# Altium PCB ALL - Copy.PcbDoc (part 1 of 2)
Units mm, origin at the board's own origin, x right, y up, seen from the top; angles counter-clockwise.
Board outline 128.4 x 123.32 mm, 2 copper layers (Top Layer, Bottom Layer); 140 components, 118 nets, 647 pads, 124 vias.
Unrouted connection lines stored in the file: 23.
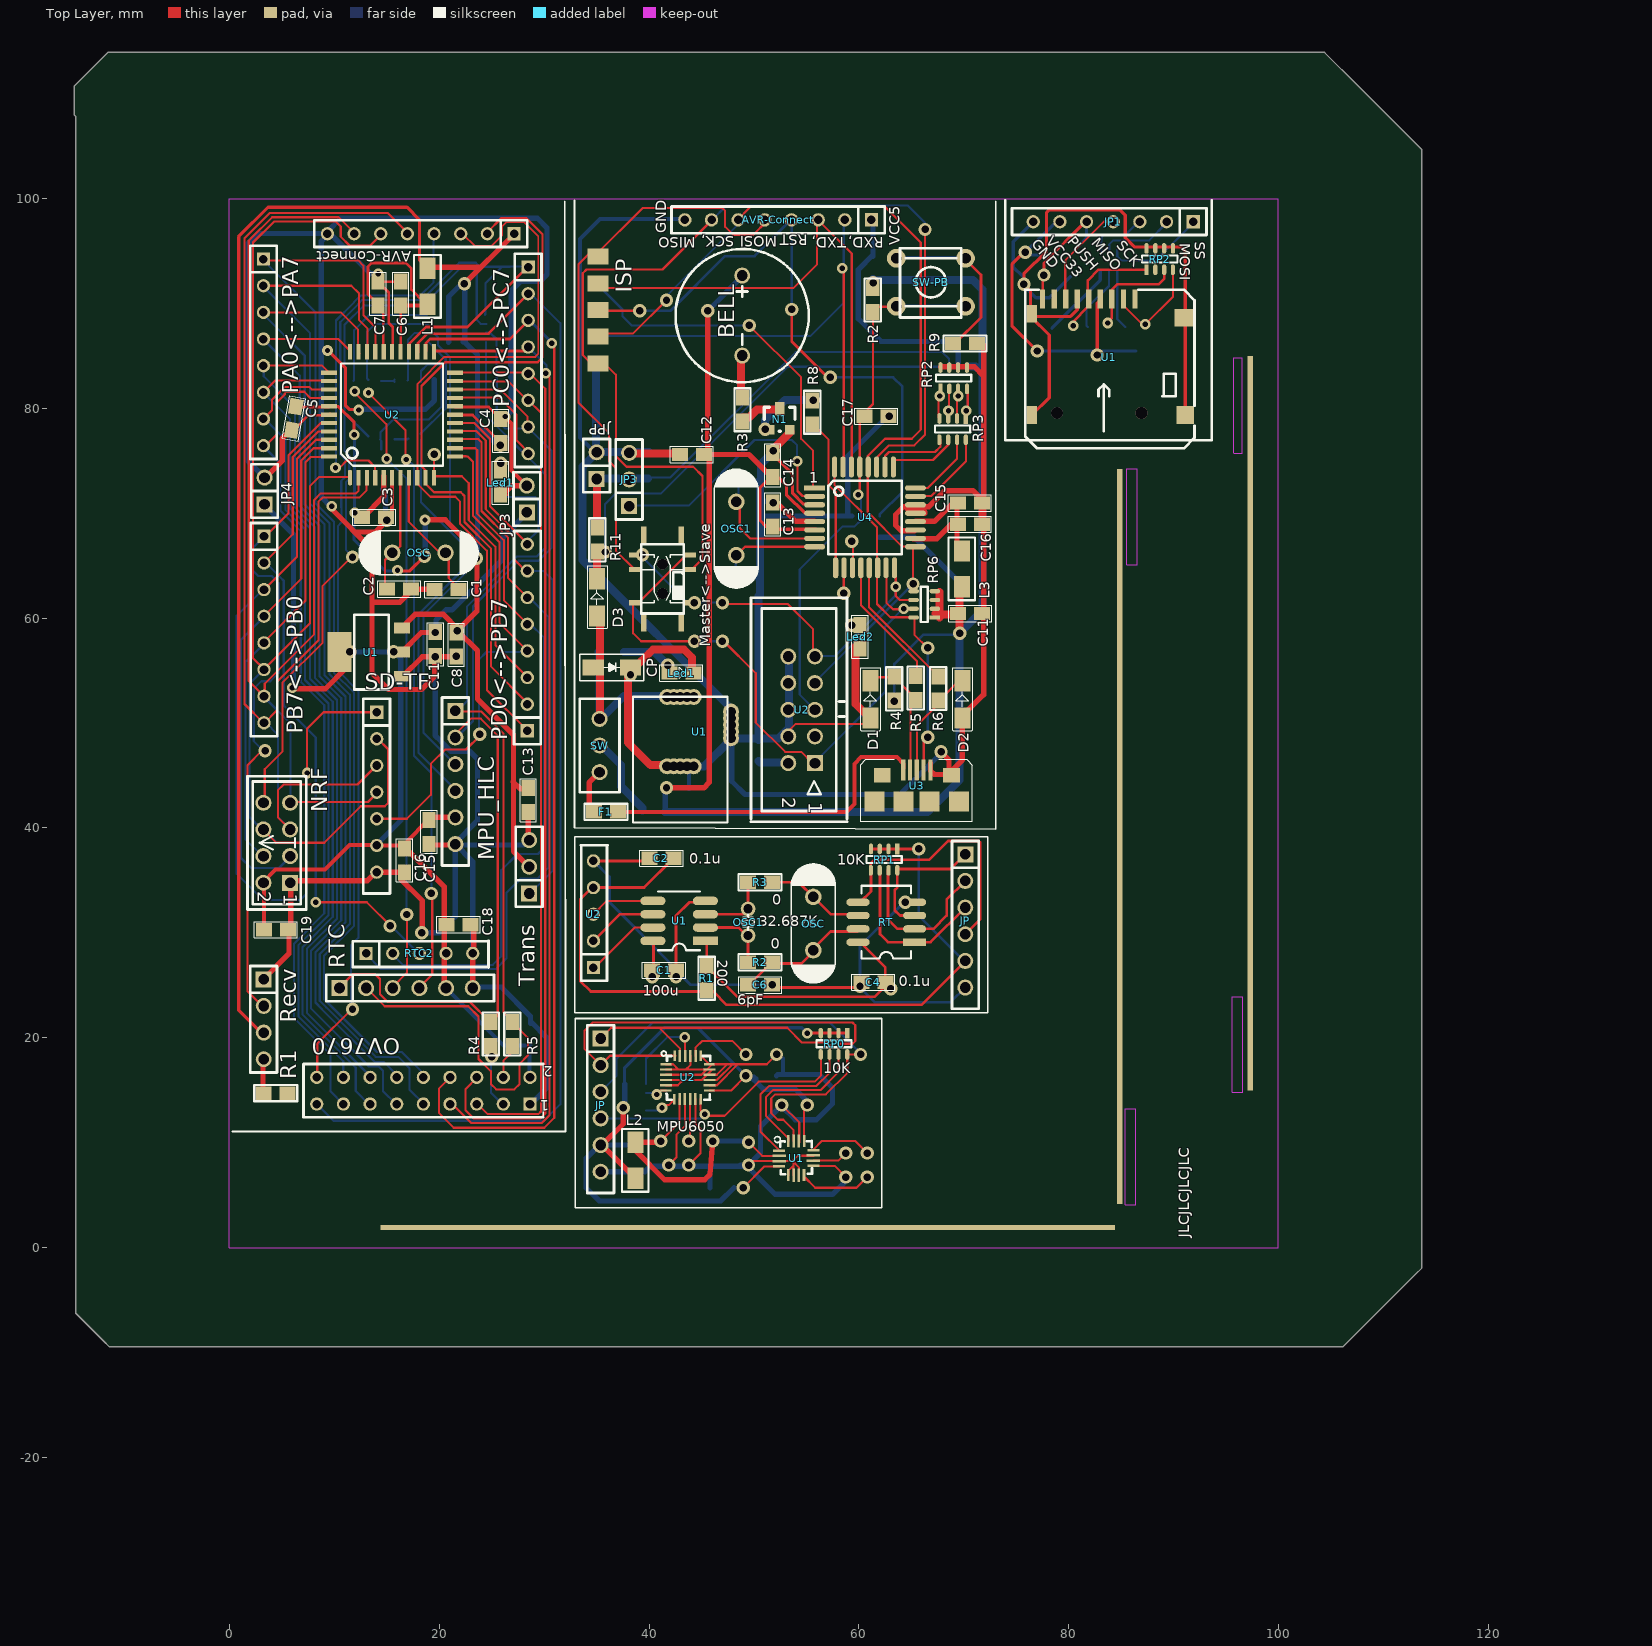
[diagram p0: Top Layer view]
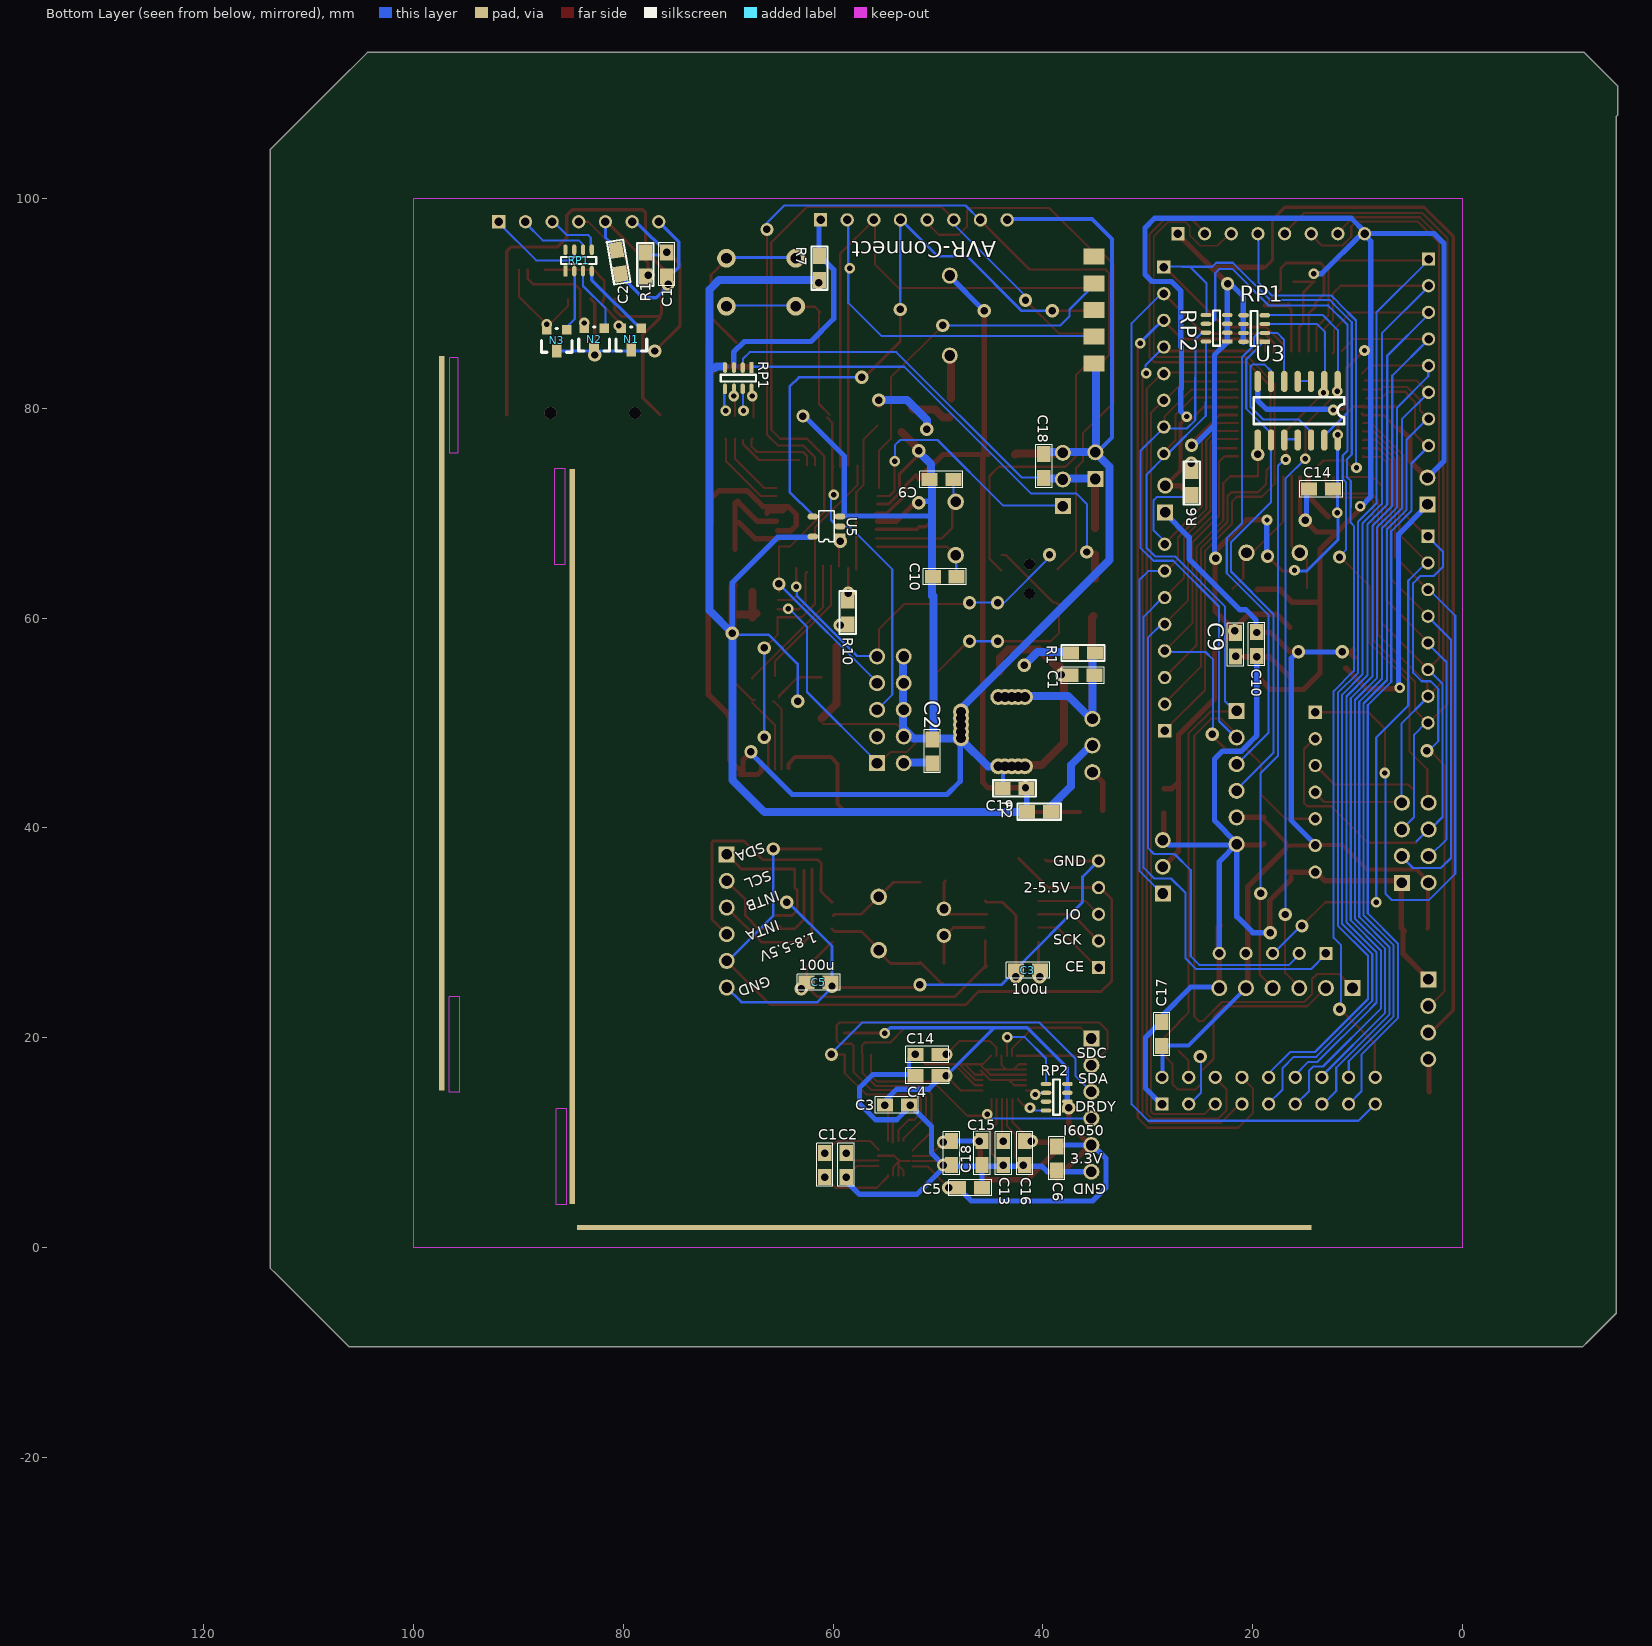
[diagram p1: Bottom Layer view, seen from below]

## Layer stack, top to bottom
Top Layer: signal copper 0.0356
Dielectric: dielectric 0.32, FR-4, Dk 4.8
Bottom Layer: signal copper 0.0356

## Board outline
-14.63,107.798 -14.63,-6.248 -11.963,-8.915 -11.455,-9.423 103.734,-9.423 106.147,-9.423 113.005,-2.565 113.64,-1.93 113.64,103.226 113.64,104.623 107.544,110.719 104.369,113.894 -10.82,113.894 -11.582,113.894 -14.63,110.846 -14.757,110.719 -14.757,107.925

## Design rules (kind name [scope] priority, off if disabled: settings)
Clearance [All] p1: gap=0.254
ComponentClearance [All] p1: gap=0.254 collisioncheckmode=3 verticalgap=0.254
PolygonConnect [All] p1: connectstyle=Relief reliefconductorwidth=0.254 reliefentries=4 polygonreliefangle="90 Angle"
RoutingVias [All] p1: holewidth=0.711 width=1.27 viastyle="Through Hole" minholewidth=0.711 minwidth=1.27 maxholewidth=0.711 maxwidth=1.27
SolderMaskExpansion [All] p1: expansion=0.102
TestPointUsage [All] p1: valid=0 allowmultiple=FALSE
Testpoint [All] p1: side=15 testpointundercomponent=TRUE minsize=1.016 maxsize=2.54 preferedsize=1.524 minholesize=0 maxholesize=1.016 preferedholesize=0.813 testpointgrid=0.025 style=1023 order=0-112345678
Width [All] p1: maxlimit=0.254 minlimit=0.254 preferedwidth=0.254
18 further rules are at their usual default settings.

## Components (designator, comment, footprint, x,y, rotation, side; value= is the part's Value field where it differs from the comment)
AVR-Connect "8PIN" SIP8 61.189,97.942 r180 top
AVR-Connect "8PIN" SIP8 27.127,96.622 r180 top
BELL "BELL" Bell 48.87,92.634 r270 top
C1 "100u" RC100 42.316,26.187 r180 top
C1 "CAPA" RC100 19.787,62.967 r0 top
C1 "CAPA" RC100 75.59,94.59 r270 bottom
C1 "0.22u" RC100 61.036,6.985 r90 bottom
C1 "0.1u" RC100 37.109,54.788 r180 bottom
C2 "0.1u" RC100 40.284,37.363 r0 top
C2 "CAPA" RC100 17.069,62.509 r180 top
C2 "CAPA" 0805 80.289,93.828 r80 bottom
C2 "4.7u" RC100 59.004,6.985 r90 bottom
C2 "0.1u" RC100 50.8,46.406 r90 bottom
C3 "CAPA" RC100 12.903,69.85 r0 top
C3 "0.1u" RC100 53.035,13.335 r0 bottom
C3 "100u" RC100 42.316,26.695 r180 bottom
C4 "0.1u" RC100 60.477,25.552 r0 top
C4 "CAPA" RC100 25.603,76.937 r90 top
C4 "0.1u" RC100 51.892,16.637 r180 bottom
C5 "CAPA" RC100 6.553,79.858 r260 top
C5 "0.1u" RC100 47.828,5.969 r180 bottom
C5 "100u" RC100 62.255,25.552 r180 bottom
C6 "6pF" RC100 49.682,25.298 r0 top
C6 "CAPA" RC100 16.078,90.018 r90 top
C6 "10u" RC100 38.43,9.398 r270 bottom
C7 "CAPA" RC100 13.919,90.018 r90 top
C8 "CAPA" RC100 21.869,58.369 r270 top
C9 "22pf" RC100 50.571,73.457 r180 bottom
C9 "CAPA" RC100 21.387,58.344 r270 bottom
C10 "22pf" RC100 50.241,64.186 r180 bottom
C10 "CAPA" RC100 19.38,58.395 r270 bottom
C11 "10u" RC100 69.698,60.681 r0 top
C11 "CAPA" RC100 19.888,58.395 r270 top
C12 "0.1u" RC100 44.958,75.336 r180 top
C13 "0.1u" RC100 51.537,68.986 r90 top
C13 "CAPA" RC100 28.727,43.536 r270 top
C13 "0.1u" RC100 43.51,9.906 r270 bottom
C14 "10u" RC100 51.537,73.685 r90 top
C14 "2.2n" RC100 50.114,18.161 r0 bottom
C14 "CAPA" RC100 12.598,72.034 r0 bottom
C15 "0.1u" RC100 69.672,71.222 r0 top
C15 "CAPA" RC100 19.279,40.513 r270 top
C15 "10n" RC100 46.05,8.128 r90 bottom
C16 "0.1u" RC100 69.672,69.19 r0 top
C16 "CAPA" RC100 16.942,37.795 r270 top
C16 "0.1u" RC100 41.478,9.906 r270 bottom
C17 "CAPA" RC100 62.56,78.969 r180 top
C17 "CAPA" RC100 28.931,19.456 r90 bottom
C18 "CAPA" RC100 22.733,30.531 r180 top
C18 "10u" RC100 48.463,9.906 r270 bottom
C18 "0.1u" RC100 40.157,73.584 r90 bottom
C19 "CAPA" RC100 5.334,30.048 r180 top
C19 "10u" 0805 42.824,43.637 r180 bottom
CP "100u" CP+140 34.671,55.296 r0 top
D1 "3.6V" DC140 63.348,54.026 r270 top
D2 "3.6V" DC140 72.111,54.026 r270 top
D3 "4148" DC140 37.313,63.754 r270 top
F1 "350mA" 0805 36.017,41.656 r180 top
F2 "FUSE" 0805 40.234,41.681 r0 bottom
ISP "SPI" DOWNLOAD-RC 32.639,97.053 r90 top
JP "6PIN" SIP6 35.382,19.939 r270 top
JP "6PIN" SIP6 70.129,37.49 r270 top
JP1 "7PIN" SIP7 91.846,97.765 r180 top
JP3 "3PIN" SIP3 38.1,70.663 r90 top
JP3 "2PIN" SIP2 28.346,70.079 r90 top
JP4 "2PIN" SIP2 3.353,70.841 r90 top
JPP "2PIN" SIP2 35.001,73.254 r90 top
L1 "LH" 1206 18.872,93.32 r270 top
L2 "LH" 1206 38.684,10.033 r270 top
L3 "LH" 1206 69.799,62.967 r90 top
Led1 "LED" LED 43.205,56.921 r0 top
Led1 "LED" LED 27.991,72.771 r270 top
Led2 "LED" LED 62.255,58.09 r270 top
Master<-->Slave "SW-DPDT" SW-DPDT 38.608,64.618 r270 top
MPU_HLC "6PIN" SIP6 21.539,51.156 r270 top
N1 "NPN-A" SOT-23A 51.486,77.927 r0 top
N1 "NPN-A" SOT-23A 78.257,87.605 r0 bottom
N2 "NPN-A" SOT-23A 81.813,87.605 r0 bottom
N3 "NPN-A" SOT-23A 85.369,87.478 r0 bottom
NRF "NRF2401" NRF2401 5.791,34.773 r270 top
OSC "32.687K" OSC200 55.651,33.426 r90 top
OSC "CRYSTAL" OSC200 15.519,66.218 r180 top
OSC1 "32.687H" OSC100 49.428,32.283 r270 top
OSC1 "12MHz" OSC200 48.311,65.989 r270 top
OV7670 "OV7670-K" SIP9X2 28.651,13.691 r180 top
PA0<-->PA7 "8PIN" SIP8 3.251,94.209 r270 top
PB7<-->PB0 "8PIN" SIP8 3.302,67.793 r270 top
PC0<-->PC7 "8PIN" SIP8 28.473,93.447 r270 top
PD0<-->PD7 "8PIN" SIP8 28.397,49.251 r90 top
R1 "200" 0805 45.618,25.552 r90 top
R1 "RES2A" 0805 4.547,14.859 r180 top
R1 "RES2A" 0805 77.749,93.574 r90 bottom
R1 "2K" 0805 36.297,56.54 r180 bottom
R2 "0" 0805 50.698,27.33 r180 top
R2 "10K" 0805 61.189,90.424 r270 top
R3 "0" 0805 50.698,34.95 r180 top
R3 "RES2A" 0805 49.022,79.731 r90 top
R4 "2.2K" 0805 63.475,53.137 r90 top
R4 "RES2A" 0805 25.044,20.244 r90 top
R5 "68" 0805 65.278,53.442 r270 top
R5 "RES2A" 0805 26.848,20.472 r270 top
R6 "68" 0805 67.412,53.391 r270 top
R6 "RES2A" 0805 25.933,73 r270 bottom
R7 "1" 0805 61.163,93.218 r90 bottom
R8 "RES2A" 0805 55.423,79.731 r270 top
R9 "RES2A" 0805 69.977,86.03 r0 top
R10 "RES2A" 0805 58.725,60.655 r270 bottom
R11 "1" 0805 35.204,67.335 r90 top
Recv "4PIN" SIP4 3.277,25.578 r270 top
RP0 "10K" RN4 58.877,20.447 r270 top
RP1 "10K" RN4 63.652,37.998 r270 top
RP1 "RESPACK4" RN4 85.496,93.066 r90 bottom
RP1 "RESPACK4" RN4 67.767,83.871 r270 bottom
RP1 "RESPACK4" RN4 18.847,86.335 r0 bottom
RP2 "RESPACK4" RN4 87.401,93.193 r90 top
RP2 "RESPACK4" RN4 67.767,81.839 r90 top
RP2 "2K" RN4 37.668,13.081 r0 bottom
RP2 "RESPACK4" RN4 22.428,86.36 r0 bottom
RP3 "RESPACK4" RN4 70.18,79.019 r270 top
RP6 "10K" RN4 67.234,60.046 r180 top
RT "SD2098" SOP-8_212 65.303,29.108 r180 top
RTC "6PIN" SIP6 10.49,24.74 r0 top
RTC2 "5PIN" SIP5 13.03,28.042 r0 top
SD-TF "7PIN" SIP7 14.046,51.029 r270 top
SW "SW-SPDT" SW-SPDT 35.281,47.854 r90 top
SW-PB "SW-PB" SW-PB 63.551,89.713 r90 top
Trans "3PIN" SIP3 28.575,33.757 r90 top
U1 "SD-MICRO" TF-2 86.639,83.033 r0 top
U1 "HMC5883L" LPCC-16 52.527,10.033 r0 top
U1 "DS1302" SO-8-197 45.364,29.235 r180 top
U1 "POWER" POWER-L 42.977,52.476 r180 top
U1 "VOTAGE_V33" SOT-223 16.459,54.458 r90 top
U2 "MPU6050" QFN-24 41.732,18.161 r0 top
U2 "5PIN" SIP5 34.696,26.695 r90 top
U2 "DOWNLOAD_SPI" DOWNLOAD 55.804,46.177 r270 top
U2 "AT90S8535_TQFP44" TQFP-44 11.506,73.381 r90 top
U3 "USB-MICRO" USB-MICRO-R 64.211,45.517 r0 top
U3 "74HC08" SO-14 11.913,82.55 r270 bottom
U4 "ATMEGA8_TQFP32" TQFP-32 55.778,72.39 r0 top
U5 "74AHCIG08" SOP-5 59.334,67.767 r0 bottom

## Footprints (in the part's own frame and the unit in brackets; to place one, negate y for a bottom-side part, rotate by r counter-clockwise, add the part's x,y. Pads: shape width x height; smd on the part's side, far side on the other; paste and mask are expansions set on the pad)
0805 [mil]
  rect 60x50 smd: 1(50,5) 2(-40,5)
  silkscreen extent -76,-26 85,36
1206 [mil]
  rect 80x60 smd: 1(0,0) 2(135,0)
  silkscreen extent -50,-50 185,50
Bell [mil]
  round 60 hole 40: 1(0,0) 2(300,0)
  silkscreen extent -100,-250 400,250
CP+140 [mil]
  rect 80x60 smd: 1(0,0) 2(140,0)
  silkscreen extent -50,-50 190,50
DC140 [mil]
  rect 80x60 smd: A(140,-89) K(0,-89)
  silkscreen extent -49,-125 187,-50
DOWNLOAD [mil]
  rect 60x60 hole 40: 1(0,0)
  round 60 hole 40: 2(0,-100) 3(-100,0) 4(-100,-100) 5(-200,0) 6(-200,-100) 7(-300,0) 8(-300,-100) 9(-400,0) 10(-400,-100)
  silkscreen extent -620,-240 220,120
DOWNLOAD-RC [mil]
  rect 60x80 smd: 1(-103,-98) 3(-203,-98) 5(-303,-98) 7(-403,-98) 9(-503,-98)
  rect 60x80 smd far side: 2(-103,-98) 4(-203,-98) 6(-303,-98) 8(-403,-98) 10(-503,-98)
LED [mil]
  rect 60x50 smd: A(-50,-85) K(40,-85)
  silkscreen extent -86,-116 75,-54
LPCC-16 [mil]
  rect 45x10 smd: 1(-5,-31) 4(-5,-90.06) 9(123,-88) 12(123,-29)
  rect 50x10 smd: 2(-5,-50.68) 3(-5,-70.37) 10(123,-68.37) 11(123,-48.68)
  rect 10x45 smd: 5(29.19,-123) 8(88,-123) 13(88.25,5) 16(29.19,5)
  rect 10x50 smd: 6(48.88,-123) 7(68.56,-123) 14(68.56,5) 15(48.88,5)
  silkscreen extent -23,-119 118,22
NRF2401 [mil]
  rect 60x60 hole 40: 1(0,0)
  round 60 hole 40: 2(0,-100) 3(-100,0) 4(-100,-100) 5(-200,0) 6(-200,-100) 7(-300,0) 8(-300,-100)
  silkscreen extent -400,-160 100,60
OSC100 [mil]
  round 55 hole 35: 1(0,0) 2(100,0)
  silkscreen extent 20,-24 80,23
OSC200 [mil]
  round 62 hole 40: 1(0,0) 2(-200,0)
  silkscreen extent -323,-83 124,83
POWER-L [mil]
  round 60 hole 36: 1(-50,0) 1(-25,0) 1(0,0) 1(25,0) 1(50,0) 2(-190,130) 2(-190,155) 2(-190,55) 2(-190,80) 2(-190,105) 2(-50,260) 2(-25,260) 2(0,260) 2(25,260) 2(50,260)
  silkscreen extent -177,-1 177,471
QFN-24 [mil]
  rect 40x9 smd: 1(-5,-27) 6(-5,-125.42) 13(158,-125.42) 18(158,-27)
  rect 45x9 smd: 2(-5,-46.68) 3(-5,-66.37) 4(-5,-86.06) 5(-5,-105.74) 14(158,-105.74) 15(158,-86.06) 16(158,-66.37) 17(158,-46.68)
  rect 9x40 smd: 7(26.62,-158) 12(125.05,-158) 19(126.05,5) 24(27.62,5)
  rect 9x45 smd: 8(46.31,-158) 9(65.99,-158) 10(85.68,-158) 11(105.36,-158) 20(106.36,5) 21(86.68,5) 22(66.99,5) 23(47.31,5)
  silkscreen extent -22,-160 161,22
RC100 [mil]
  rect 60x50 smd: 1(-10,-10) 2(80,-10)
  silkscreen extent -45,-41 116,21
RN4 [mil]
  rect 40x16 smd: 1(0,0)
  oval 40x16 smd: 2(0,-33) 3(0,-66) 4(0,-99) 5(80,-99) 6(80,-66) 7(80,-33) 8(80,0)
  silkscreen extent 27,-116 53,17
SIP2 [mil]
  rect 60x60 hole 40: 1(0,0)
  round 60 hole 40: 2(100,0)
  silkscreen extent -50,-50 150,50
SIP3 [mil]
  rect 60x60 hole 40: 1(0,0)
  round 60 hole 40: 2(100,0) 3(200,0)
  silkscreen extent -50,-50 250,50
SIP4 [mil]
  rect 60x60 hole 40: 1(0,0)
  round 60 hole 40: 2(100,0) 3(200,0) 4(300,0)
  silkscreen extent -50,-50 350,50
SIP5 [mil]
  rect 50x50 hole 32: 1(0,0)
  round 50 hole 32: 2(100,0) 3(200,0) 4(300,0) 5(400,0)
  silkscreen extent -50,-53 459,47
SIP6 [mil]
  rect 60x60 hole 40: 1(0,0)
  round 60 hole 40: 2(100,0) 3(200,0) 4(300,0) 5(400,0) 6(500,0)
  silkscreen extent -50,-50 580,50
SIP7 [mil]
  rect 50x50 hole 32: 1(0,0)
  round 50 hole 32: 2(100,0) 3(200,0) 4(300,0) 5(400,0) 6(500,0) 7(600,0)
  silkscreen extent -50,-50 680,50
SIP8 [mil]
  rect 50x50 hole 32: 1(0,0)
  round 50 hole 32: 2(100,0) 3(200,0) 4(300,0) 5(400,0) 6(500,0) 7(600,0) 8(700,0)
  silkscreen extent -50,-50 750,50
SIP9X2 [mil]
  rect 50x50 hole 32: 1(0,0)
  round 50 hole 32: 2(0,-100) 3(100,0) 4(100,-100) 5(200,0) 6(200,-100) 7(300,0) 8(300,-100) 9(400,0) 10(400,-100) 11(500,0) 12(500,-100) 13(600,0) 14(600,-100) 15(700,0) 16(700,-100) 17(800,0) 18(800,-100)
  silkscreen extent -50,-150 850,50
SO-8-197 [mm]
  rect 2.4x0.8 smd: 1(0,0)
  oval 2.4x0.8 smd: 2(0,-1.27) 3(0,-2.54) 4(0,-3.81) 5(5,-3.81) 6(5,-2.54) 7(5,-1.27) 8(5,0)
  silkscreen extent 0.5,-4.7 4.5,0.89
SO-14 [mil]
  oval 80x24 smd: 1(0,0) 2(0,-50) 3(0,-100) 4(0,-150) 5(0,-200) 6(0,-250) 7(0,-300) 8(220,-300) 9(220,-250) 10(220,-200) 11(220,-150) 12(220,-100) 13(220,-50) 14(220,0)
  silkscreen extent 60,-315 160,25
SOP-5 [mil]
  rect 40x22 smd: 1(0,0)
  oval 40x22 smd: 2(0,-37.5) 3(0,-75) 4(102,-75) 5(102,0)
  silkscreen extent 21,-96 80,19
SOP-8_212 [mm]
  rect 2.2x0.7 smd: 1(0,0)
  oval 2.2x0.7 smd: 2(0,-1.27) 3(0,-2.54) 4(0,-3.81) 5(5.4,-3.81) 6(5.4,-2.54) 7(5.4,-1.27) 8(5.4,0)
  silkscreen extent 0.34,-5.38 5.06,1.57
SOT-23A [mil]
  rect 36x36 smd: B(0,0) E(75,0)
  rect 36x50 smd: C(38,80)
  silkscreen extent -20,-5 95,85
SOT-223 [mil]
  rect 40x60 smd: 1(0,0) 2(90.55,0) 3(181.1,0)
  rect 150x90 smd: 4(90,235)
  silkscreen extent -50,50 230,180
SW-DPDT [mil]
  rect 65x20 smd: 0(-130,175) 0(-130,35) 0(200,175) 0(200,35)
  rect 20x40 smd: 1(0,0) 2(-55,0) 3(125,0) 4(0,210) 5(-55,210) 6(125,210)
  silkscreen extent -95,25 165,185
SW-PB [mil]
  round 70 hole 40: 1(0,0) 2(180,0) 3(0,-260) 4(180,-260)
  silkscreen extent -42,-244 218,-14
SW-SPDT [mil]
  round 60 hole 40: 1(-100,0) 2(0,0) 3(100,0)
  silkscreen extent -175,-75 175,75
TF-2 [mm]
  rect 1x1.7 smd: 0(-10.16,-3.683) 0(-10.16,5.969)
  rect 1.778x1.7 smd: 0(4.318,5.588)
  rect 1.7x1.7 smd: 0(4.445,-3.683)
  rect 0.5x1.8 smd: 1(-0.344,7.366) 2(-1.444,7.366) 3(-2.544,7.366) 4(-3.644,7.366) 5(-4.744,7.366) 6(-5.844,7.366) 7(-6.944,7.366) 8(-8.044,7.366) 9(-9.144,7.366)
  silkscreen extent -10.79,-6.86 5.33,8.25
TQFP-32 [mm]
  rect 2x0.5 smd: 1(0,0)
  oval 2x0.5 smd: 2(0,-0.8) 3(0,-1.6) 4(0,-2.4) 5(0,-3.2) 6(0,-4) 7(0,-4.8) 8(0,-5.6) 17(9.6,-5.6) 18(9.6,-4.8) 19(9.6,-4) 20(9.6,-3.2) 21(9.6,-2.4) 22(9.6,-1.6) 23(9.6,-0.8) 24(9.6,0)
  oval 0.5x2 smd: 9(2,-7.6) 10(2.8,-7.6) 11(3.6,-7.6) 12(4.4,-7.6) 13(5.2,-7.6) 14(6,-7.6) 15(6.8,-7.6) 16(7.6,-7.6) 25(7.5,2) 26(6.7,2) 27(5.9,2) 28(5.1,2) 29(4.3,2) 30(3.5,2) 31(2.7,2) 32(1.9,2)
  silkscreen extent 1.3,-6.3 8.3,0.7
TQFP-44 [mm]
  oval 1.5x0.4 smd: 1(0,0)
  rect 1.5x0.4 smd: 2(0,-0.8) 3(0,-1.6) 4(0,-2.4) 5(0,-3.2) 6(0,-4) 7(0,-4.8) 8(0,-5.6) 9(0,-6.4) 10(0,-7.2) 11(0,-8) 23(12,-8) 24(12,-7.2) 25(12,-6.4) 26(12,-5.6) 27(12,-4.8) 28(12,-4) 29(12,-3.2) 30(12,-2.4) 31(12,-1.6) 32(12,-0.8) 33(12,0)
  rect 0.4x1.5 smd: 12(2,-10) 13(2.8,-10) 14(3.6,-10) 15(4.4,-10) 16(5.2,-10) 17(6,-10) 18(6.8,-10) 19(7.6,-10) 20(8.4,-10) 21(9.2,-10) 22(10,-10) 34(10,2) 35(9.2,2) 36(8.4,2) 37(7.6,2) 38(6.8,2) 39(6,2) 40(5.2,2) 41(4.4,2) 42(3.6,2) 43(2.8,2) 44(2,2)
  silkscreen extent 1.13,-8.87 10.87,0.87
USB-MICRO-R [mm]
  rect 0.4x2 smd: 1(0,0) 2(0.65,0) 3(1.3,0) 4(1.95,0) 5(2.6,0)
  rect 1.6x1.4 smd: 6(4.6,-0.5) 11(-2,-0.5)
  rect 1.9x1.9 smd: 7(5.3,-3) 8(2.5,-3) 9(0.05,-3) 10(-2.75,-3)
  silkscreen extent -4.09,-4.88 6.6,1.02

## Part data
C1 C1 C1 C2 C2 C2 C3 C3 C4 C4 C5 C5 C6 C9 C10 C11 C12 C13 C13 C14 C14 C15 C15 C16 C16 C18 C18 C19: library part CAPA
C6: library part CAPVAR
CP: library part CAP+
D1 D2 D3: library part DIODE
F1: library part FUSE
OSC OSC1 OSC1: library part CRYSTAL
R1 R1 R2 R4 R5 R6 R7 R11: library part RES2A
R2 R3: library part RES2B
RP0 RP1 RP2 RP6: library part RESPACK4
U2 U4: "Atmel Microcontroller - Library created by carel..  <www.mpfreezone.com>"

## Free pads (board coordinates)
  rect 70x0.508 smd: 1(49.416,1.93)
  rect 70x0.508 smd far side: 1(49.416,1.93)
  rect 0.508x70 smd: 1(84.836,39.179) 1(97.282,49.974)
  rect 0.508x70 smd far side: 1(84.836,39.179) 1(97.282,49.974)

## Via types
v1: diameter 1.27, hole 0.711, Top Layer to Bottom Layer, 84 vias
v2: diameter 1.016, hole 0.508, Top Layer to Bottom Layer, 35 vias
v3: diameter 1.143, hole 1.143, Top Layer to Bottom Layer, 2 vias
v4: diameter 1.016, hole 1.016, Top Layer to Bottom Layer, 2 vias
v5: diameter 1.016, hole 0.508, Top Layer to Bottom Layer, tented top, 1 vias

## Nets (pads, with @x,y where several pads share a name; then routed paths per layer and width w, separated by ;. In a path a pad name is that pad's centre, name@x,y a point inside that pad or via, vN(x,y) a via of type N, cw(c..) or ccw(c..) an arc to the next point about the centre after c; other vN are vias at no path point)
ADR3: ISP.4 U4.1 | length 34.2
  Top Layer w0.203: v1@49.593,87.82 54.483,82.931 54.483,77.089 55.626,75.946 U4.1@55.626,72.39
  Bottom Layer w0.203: ISP.4@35.179,91.694 37.465,89.408 37.465,88.773 38.354,87.884 v1(49.53,87.884)
ANT: R1.2@5.563,14.732
AUXCL: RP2.8@39.7,13.081 U2.7@42.408,14.148 | length 3.2
  Top Layer w0.203: v2(41.224,13.335) 41.478,13.589 41.859,13.589 42.367,14.097 U2.7@42.367,14.224
  Bottom Layer w0.203: RP2.8@39.7,13.081 40.97,13.081 v2(41.224,13.335)
AUXDA: RP2.6@39.7,14.757 U2.6@41.605,14.975 | length 2.1
  Top Layer w0.203: v2(40.716,14.605) 41.086,14.975 U2.6@41.605,14.975
  Bottom Layer w0.203: RP2.6@39.7,14.757 40.564,14.757 v2(40.716,14.605)
AVCC: C6.1@16.332,89.764 C7.1 C15.1@69.418,70.968 C16.1@69.418,68.936 L1.2 L3.2 U2.27 U2.29 U4.18 U4.20 | length 36.7
  Top Layer w0.254: C7.1@14.046,89.637 14.681,89.002 U2.29@14.681,85.446 ; C7.1@14.046,89.764 14.046,90.018 13.208,90.856 13.208,93.497 13.538,93.828 16.84,93.828 17.348,93.32 17.348,91.288 L1.2@18.618,90.018 ; U2.27@16.332,85.446 16.332,89.383 C6.1@16.459,89.51
  Top Layer w0.381: C6.1@16.586,89.891 16.713,89.764 L1.2@18.872,89.764
  Top Layer w0.508: U4.18@65.151,67.564 67.437,67.564 C16.1@68.961,69.088 ; U4.20@65.405,69.215 67.183,69.215 C15.1@69.088,71.12 ; L3.2@69.342,66.548 C15.1@69.342,70.993
BELL: R8.1 U4.9 | length 14.6
  Top Layer w0.203: R8.1@55.753,78.359 57.083,77.029 57.083,72.704 57.785,72.003 U4.9@57.785,64.643
CE: U1.5@40.364,33.045 U2.3@34.696,31.775 | length 6.2
  Top Layer w0.203: U2.3@34.696,31.775 35.966,33.045 U1.5@40.411,33.045
CLK1: RP2.5@39.7,15.596 U2.22@43.434,18.288 | length 8.8
  Top Layer w0.203: v2(43.383,20.066) 43.434,20.015 U2.22@43.434,18.288
  Bottom Layer w0.203: RP2.5@39.7,15.596 39.7,18.034 41.732,20.066 v2(43.383,20.066)
CPOUT: C14.1@49.86,18.415 U2.20@44.434,18.288 | length 6.4
  Top Layer w0.203: U2.20@44.434,18.288 44.434,19.085 45.034,19.685 47.955,19.685 v1(49.225,18.415)
D1+: R6.2@67.539,54.407 U4.13 | length 13.6
  Top Layer w0.203: U4.13@60.96,65.024 60.96,61.027 67.691,54.296 R6.2@67.691,54.229
D1-: R5.2@65.405,54.458 U4.12 | length 12.8
  Top Layer w0.203: U4.12@60.198,65.024 60.198,61.214 65.532,55.88 R5.2@65.532,54.483
DRDY: JP.3@35.382,14.859 MPU_HLC.3 RP0.8 RP1.2@18.847,87.173 U1.15 U3.5@16.993,82.55 | length 98.2
  Top Layer w0.203: U1.15@53.769,10.16 53.769,11.205 52.781,12.192 52.273,12.192 51.638,12.827 51.638,14.224 52.019,14.605 56.845,14.605 58.877,16.637 RP0.8@58.877,18.415 v1(60.147,18.415)
  Bottom Layer w0.203: U3.5@16.993,82.652 17.018,82.677 17.018,86.512 17.678,87.173 19.456,87.173 19.888,86.741 19.888,86.004 21.031,84.861 21.031,69.037 22.479,67.589 22.479,64.262 18.517,60.3 18.517,49.047 MPU_HLC.3@21.565,45.999 ; JP.3@35.382,14.859 36.906,16.383 36.906,18.034 40.335,21.463 57.226,21.463 60.147,18.542 v1(60.147,18.415)
GND: AVR-Connect.8 C1.1@19.533,62.713 C1.1@37.363,54.534 C1.1@42.57,26.441 C1.2@75.844,92.558 C2.1@17.323,62.763 C2.1@40.03,37.109 C2.1@58.75,6.731 C2.2@50.546,48.438 C2.2@80.238,92.805 C3.1@42.57,26.441 C3.1@52.781,13.589 C3.2@14.935,69.596 C4.1@52.146,16.383 C4.1@60.223,25.298 C4.2@25.857,78.969 C5.2 C6.2 C7.2 C8.2 C9.1@50.825,73.203 C9.2@21.641,56.312 C10.1@50.495,63.932 C10.2@19.634,56.363 C11.2 C12.2 C13.2 C14.2 C15.1@45.796,7.874 C15.2@19.025,38.481 C15.2@71.704,70.968 C16.2 C17.1@62.814,79.223 C17.2@28.677,21.488 C18.1@22.987,30.785 C18.2@39.903,75.616 C18.2@48.717,7.874 C19.1@5.588,30.302 C19.2@43.84,43.764 CP.2 D1.A D2.A ISP.10 JP1.7 JP3.2@28.346,72.619 JP3.3 JP4.2 JP.6 JPP.2 Led1.K Led2.K MPU_HLC.6 N1.E@53.391,77.927 NRF.1 OV7670.1 R9.1 Recv.1 RP2.5@70.282,83.871 RP2.5@89.916,95.225 RP2.6@69.444,83.871 RP2.6@89.078,95.225 RP2.7@68.605,83.871 RP2.7@88.24,95.225 RP2.8@67.767,83.871 RP2.8@87.401,95.225 RT.4 RTC2.5 RTC.6 SD-TF.7 Trans.3 U1.0 U1.1@16.459,54.458 U1.2@41.707,45.872 U1.2@42.342,45.872 U1.2@42.977,45.872 U1.2@43.612,45.872 U1.2@44.247,45.872 U1.2@47.803,48.539 U1.2@47.803,49.174 U1.2@47.803,49.809 U1.2@47.803,50.444 U1.2@47.803,51.079 U1.3@52.4,8.246 U1.4@45.364,33.045 U1.5@53.269,6.909 U1.6@53.769,6.909 U1.6@80.795,90.399 U1.7@54.269,6.909 U1.9@55.651,7.798 U1.11 U1.14 U2.1@41.605,17.475 U2.2@41.605,16.975 U2.3@41.605,16.475 U2.4@41.605,15.975 U2.4@53.264,48.717 U2.5@34.696,36.855 U2.5@41.605,15.475 U2.6@15.506,73.381 U2.6@53.264,51.257 U2.8@53.264,53.797 U2.9@43.408,14.148 U2.10@53.264,56.337 U2.11@44.408,14.148 U2.14@45.745,15.475 U2.15@45.745,15.975 U2.16@45.745,16.475 U2.17@45.745,16.975 U2.18 U2.19@44.934,18.288 U2.21@43.934,18.288 U2.28 U2.39 U3.5@66.811,45.517 U3.6@68.811,45.017 U3.7@19.533,82.55 U4.3 U4.5 U4.19 U4.21 U4.22 U5.3 | length 871.2
  Top Layer w0.203: U2.5@41.605,15.475 42.729,15.475 43.229,15.975 ; U2.4@41.605,15.975 45.007,15.975 U2.17@45.923,16.891 ; U2.3@41.605,16.475 44.999,16.475 U2.18@45.923,17.399 ; U2.2@41.605,16.975 U2.17@45.499,16.975 ; U2.1@41.605,17.475 42.291,17.475 42.748,17.018 ; v1(41.859,7.874) 42.621,8.636 42.621,10.795 43.408,11.582 U2.9@43.408,14.148 ; 43.51,16.975 43.934,17.399 U2.21@43.934,18.288 ; v1(43.764,7.874) 44.907,9.017 44.907,11.303 44.408,11.802 U2.11@44.408,14.148 ; U2.19@44.934,18.288 U2.18@45.745,17.475 51.206,17.475 ; U2.14@45.745,15.475 46.463,15.475 48.463,17.475 ; U2.15@45.745,15.975 46.455,15.975 47.955,17.475 ; U2.16@45.745,16.475 46.447,16.475 47.447,17.475 ; v1(49.479,7.874) 49.851,8.246 U1.3@52.4,8.246 ; 51.206,17.45 51.206,17.475 ; v1@52.019,18.288 51.206,17.475 ; U1.3@52.654,8.255 53.67,8.255 ; v1(52.654,13.589) 54.305,11.938 U1.14@54.305,10.033 ; U2.4@53.086,49.022 53.975,49.911 D1.A@60.96,49.911 ; U1.5@53.269,6.909 53.269,7.345 53.769,7.845 ; U1.6@53.769,6.909 53.769,8.157 ; U1.7@54.269,6.909 54.269,7.657 53.67,8.255 ; U1.9@55.651,7.798 57.683,7.798 v1(58.75,6.731) ; U1.11@55.702,8.763 54.178,8.763 53.67,8.255
  Top Layer w0.254: C5.2@6.045,77.826 7.558,79.338 9.463,79.338 U2.39@9.601,79.477 ; U2.28@15.57,85.446 15.57,87.732 15.189,88.113 15.189,91.034 C7.2@14.173,92.05 C6.2@16.078,92.05 ; U2.18@21.506,80.112 24.714,80.112 C4.2@25.857,78.969 ; Led1.K@25.883,71.755 26.492,71.755 ; C4.2@25.971,78.854 C4.2@25.984,78.842 ; U2.5@34.696,36.855 39.649,36.855 C2.1@39.776,36.982 ; C1.1@42.57,26.441 42.57,31.648 43.84,32.918 45.364,32.918 U1.4@45.491,33.045 ; C6.2@51.841,24.79 59.969,24.79 C4.1@60.35,25.171
  Top Layer w0.305: v2@9.55,85.344 11.074,83.82 11.074,80.239 11.43,79.883 v2@12.344,79.883 ; C14.2@51.816,75.565 53.677,73.704 53.677,71.882 54.693,70.866 U4.3@55.753,70.866 ; U1.0@76.352,89.002 76.352,91.161 v1(75.717,91.796) 75.717,92.812 77.876,94.971 77.876,98.654 78.13,98.908 84.861,98.908 85.369,98.4 85.369,96.241 86.258,95.352 90.703,95.352 91.084,94.971 U1.0@91.084,79.35 ; U1.0@76.479,79.35 78.13,81.001 78.13,86.97 76.479,88.621 76.479,88.875 76.606,88.748 80.162,88.748 80.795,89.381 U1.6@80.795,90.399
  Top Layer w0.381: C3.2@15.037,69.545 15.494,70.002 U2.6@15.494,73.406 ; C4.2@25.933,78.969 26.467,78.969 26.886,78.549 26.886,74.079 JP3.2@28.372,72.593
  Top Layer w0.508: Recv.1@3.327,25.654 5.69,28.016 C19.1@5.69,30.302 ; JP4.2@3.505,73.431 3.505,73.457 5.029,74.981 5.029,77.089 C5.2@5.969,78.029 ; C19.1@5.537,30.175 5.842,30.48 NRF.1@5.842,34.9 ; NRF.1@5.842,34.95 13.132,34.95 SD-TF.7@14.046,35.865 ; v2@9.728,70.739 9.703,70.714 9.703,70.688 9.677,70.663 9.677,70.46 13.589,66.548 13.589,54.712 ; 11.913,68.199 13.945,68.199 C3.2@14.986,69.24 ; 13.589,54.778 15.179,53.188 ; 13.589,61.519 16.256,61.519 17.323,62.586 C2.1@17.323,62.763 ; SD-TF.7@14.021,35.763 C16.2@16.688,35.763 ; 15.164,53.188 18.313,53.188 19.558,54.432 19.558,56.21 19.533,56.236 C11.2@19.533,56.134 ; C16.2@16.358,35.306 16.358,35.088 18.39,33.056 v1@18.39,30.023 ; U1.1@16.497,54.419 18.39,56.312 C11.2@19.583,56.312 ; C2.1@17.424,62.738 19.507,62.738 C1.1@19.558,62.687 ; C15.2@18.948,38.506 19.075,38.379 MPU_HLC.6@21.539,38.379 ; v1(19.634,56.312) C8.2@21.615,56.312 ; C18.1@23.114,30.709 23.292,30.531 RTC2.5@23.292,27.991 ; RTC.6@23.19,24.74 23.19,28.067 RTC2.5@23.266,28.143 ; Led1.K@26.01,71.73 26.873,72.593 JP3.2@28.346,72.593 ; Trans.3@28.448,39.091 28.499,39.141 C13.2@28.499,41.402 ; C13.2@52.07,71.12 53.975,69.215 U4.5@55.753,69.215 ; 64.643,70.358 64.77,70.231 66.167,70.231 66.294,70.104 U4.21@66.294,69.977 ; U4.19@65.278,68.326 64.008,68.326 63.5,68.834 63.5,69.85 64.262,70.612 66.675,70.612 68.199,72.136 70.866,72.136 71.628,71.374 71.628,68.961 C16.2@71.755,68.834 ; U3.5@66.818,46.212 66.818,45.45 67.183,45.085 U3.6@68.834,45.085 ; RP2.8@67.767,83.947 70.993,83.947 71.882,83.058 ; v1@67.945,47.117 68.58,46.482 U3.6@68.58,45.085 ; U3.6@68.58,45.212 69.85,46.482 D2.A@69.85,50.546 ; D2.A@69.977,50.673 69.977,50.8 71.882,52.705 71.882,85.979 R9.1@71.755,86.106
  Top Layer w0.762: JP3.3@38.1,75.692 42.545,75.692 C12.2@42.672,75.565 ; CP.2@38.354,54.864 37.973,54.483 37.973,48.133 40.132,45.974 43.942,45.974 U1.2@44.069,45.847 ; CP.2@38.354,55.372 38.735,55.372 40.005,56.642 40.386,57.023 43.307,57.023 44.069,56.261 44.069,54.991 Led1.K@44.196,54.864 ; CP.2@38.481,55.118 CP.2@38.608,54.991 ; C14.2@51.816,75.819 51.816,76.073 N1.E@53.467,77.724 ; Led2.K@59.69,57.277 59.69,51.816 D1.A@61.087,50.419
  Bottom Layer w0.203: SD-TF.7@13.868,35.865 SD-TF.7@13.919,35.865
  Bottom Layer w0.254: U2.5@34.823,36.855 34.823,36.728 36.22,35.331 36.22,32.918 C3.1@42.57,26.568 ; C3.1@42.316,26.695 43.967,25.044 v1(51.714,25.044) ; C5.2@60.096,25.171 60.096,24.79 61.493,23.393 68.732,23.393 JP.6@70.129,24.79 ; C5.2@60.096,25.552 60.096,28.727 64.287,32.918 v1(64.414,32.918)
  Bottom Layer w0.305: C1.2@75.59,92.558 74.701,93.447 74.701,95.86 JP1.7@76.606,97.765 ; C1.2@75.717,91.923 75.717,91.669 76.86,90.526 78.13,90.526 C2.2@80.162,92.558
  Bottom Layer w0.381: JPP.2@34.925,75.692 33.401,77.216 33.401,96.139 35.306,98.044 AVR-Connect.8@43.434,98.044 ; C19.2@43.815,43.688 U1.2@43.815,45.72 ; C4.1@52.781,16.51 C14.2@52.781,18.034
  Bottom Layer w0.508: JP4.2@3.454,73.304 1.778,74.981 1.778,95.707 2.718,96.647 9.601,96.647 13.437,92.812 14.173,92.812 v2@14.199,92.837 ; AVR-Connect.8@9.347,96.647 9.347,96.825 10.617,98.095 29.362,98.095 30.277,97.18 30.277,92.735 29.616,92.075 27.762,92.075 26.848,91.161 26.848,85.852 ; AVR-Connect.8@9.449,96.596 8.763,95.91 8.763,71.526 v2@9.703,70.587 ; v2@12.217,79.858 12.243,79.883 18.669,79.883 19.533,80.747 U3.7@19.533,82.702 ; C14.2@14.63,72.288 14.884,72.034 v1@14.884,69.139 ; v1(18.339,30.023) 19.99,30.023 21.514,31.547 MPU_HLC.6@21.514,38.557 ; C10.2@19.634,56.337 19.609,56.312 19.609,48.819 20.168,48.26 20.168,48.235 21.082,47.32 22.885,47.32 23.647,46.558 23.647,40.691 21.539,38.583 MPU_HLC.6@21.539,38.354 ; MPU_HLC.6@21.488,38.506 23.19,36.805 RTC2.5@23.19,28.042 ; MPU_HLC.6@21.996,38.659 21.742,38.659 21.463,38.379 28.016,38.379 Trans.3@28.346,38.71 ; RTC.6@23.165,24.74 23.266,24.841 25.908,24.841 28.702,22.047 C17.2@28.702,21.387 ; v2@26.238,79.096 26.873,79.731 26.873,81.839 ; 26.797,85.852 26.797,81.864 26.848,81.813 ; OV7670.1@28.6,13.691 OV7670.1@28.6,13.767 ; OV7670.1@28.727,13.513 28.727,13.691 30.226,15.189 30.226,20.041 C17.2@28.829,21.438 ; JP.6@35.382,7.239 39.573,7.239 40.081,7.747 v1@49.352,7.747 ; C5.2@45.796,5.715 C15.1@45.796,7.874 ; U1.2@47.879,48.514 47.879,44.45 49.149,43.18 63.881,43.18 v1@67.818,47.117 ; C18.2@48.59,7.747 C18.2@48.717,7.874 ; 50.546,69.342 50.927,69.723 U5.3@59.309,69.723 ; 50.546,70.866 50.8,71.12 v1@51.816,71.12 ; C4.1@52.146,16.383 52.273,16.51 56.21,16.51 57.48,15.24 57.48,13.716 55.956,12.192 53.924,12.192 52.654,13.462 v1(52.654,13.589) 50.622,11.557 50.622,9.017 v1@49.352,7.747 ; C2.1@58.623,6.223 57.48,5.08 52.019,5.08 v1@49.352,7.747 ; U5.3@58.928,69.723 58.928,75.438 v1@62.738,79.248 ; v1@62.865,79.121 v1@62.992,79.248
  Bottom Layer w0.762: JPP.2@34.671,75.819 C18.2@40.005,75.819 ; JPP.2@34.925,75.692 33.655,74.422 33.655,65.532 47.879,51.308 U1.2@47.879,49.911 ; JPP.2@34.925,75.819 ISP.10@34.925,84.201 ; U1.2@41.656,45.847 45.212,45.847 U1.2@47.752,48.387 ; U1.2@47.752,48.514 52.324,48.514 53.34,49.53 U2.10@53.34,56.388 ; C2.2@50.419,48.387 50.419,62.103 ; C10.1@50.419,63.881 C10.1@50.546,64.008 ; 50.546,62.103 50.546,73.152 C9.1@50.673,73.279 ; C9.1@50.673,73.152 50.673,74.676 v1@51.943,75.946
  other v1: 52.146,18.415 60.096,24.917 42.57,25.806 67.818,47.244 38.227,54.61 21.615,56.337 15.011,69.317 51.816,70.993 51.816,75.946 62.865,79.248
  other v2: 9.754,70.637 26.289,79.197 12.319,79.832 9.347,85.496 14.199,92.812
INT2401: NRF.8 RP2.6@24.46,88.036 U3.13 | length 73.2
  Top Layer w0.203: NRF.8@3.378,42.367 3.378,45.593 5.055,47.269 5.055,53.823 8.89,57.658 ; 8.89,57.683 8.89,63.068 v1@11.659,65.837
  Bottom Layer w0.203: 10.973,79.578 U3.13@13.259,77.292 ; 11.1,72.898 11.1,66.497 v1@11.709,65.888 ; 11.1,72.923 11.43,73.254 11.43,75.489 10.973,75.946 10.973,87.935 12.84,89.802 ; 12.852,89.789 18.466,89.789 21.946,93.269 23.165,93.269 23.571,92.862 23.571,88.417 23.952,88.036 RP2.6@24.511,88.036
  other v1: 11.735,65.811
INT6050: JP.4@35.382,12.319 MPU_HLC.4 RP0.5 RP1.1@18.847,86.335 U2.12@44.908,14.148 U3.9@18.263,76.962 | length 75.2
  Top Layer w0.203: U2.12@44.908,14.148 44.908,13.08 45.415,12.573 47.193,12.573 50.444,15.824 55.788,15.824 56.363,16.399 RP0.5@56.363,18.415
  Bottom Layer w0.203: U3.9@18.212,77.546 20.625,79.959 20.625,84.658 ; U3.9@18.263,76.962 18.263,71.044 22.073,67.234 22.073,64.43 18.034,60.392 18.034,47.142 MPU_HLC.4@21.692,43.485 ; RP1.1@18.898,86.36 20.625,84.633 ; JP.4@35.382,12.319 44.907,12.319 v2(45.288,12.7)
INTA: JP.4@70.129,29.87 RP1.3@18.847,88.011 RP1.5@61.138,35.966 RT.5 RTC.4 U3.2@13.183,82.55 | length 95.2
  Top Layer w0.203: v2@13.233,81.458 16.789,77.902 v2@16.789,75.159 ; RTC.4@18.186,24.765 18.186,24.892 19.329,26.035 19.329,33.68 v1@19.253,33.757
  Top Layer w0.254: RT.5@60.096,32.918 61.138,33.96 RP1.5@61.138,35.966 ; RP1.5@61.112,35.966 61.112,36.601 61.493,36.982 66.7,36.982 68.478,38.76 71.399,38.76 71.526,38.633 71.526,31.267 JP.4@70.129,29.87
  Bottom Layer w0.203: U3.2@13.233,82.702 13.106,82.829 13.106,87.249 13.894,88.036 RP1.3@18.923,88.036 ; v2@16.866,75.133 16.967,75.133 17.602,74.498 17.602,46.863 19.279,45.187 ; v1@19.253,33.833 19.279,33.858 19.279,45.212
  other v1: 19.228,33.757
  other v2: 16.866,75.108 13.259,81.483
INTB: JP.3@70.129,32.41 RP1.4@18.847,88.849 RP1.6@61.976,35.966 RT.1 RTC.3 U3.1@11.913,82.55 | length 88.2
  Top Layer w0.203: v2@11.811,81.61 14.961,78.461 v2@14.961,75.159 ; RTC.3@15.57,24.74 15.57,24.841 16.916,26.187 16.916,31.801 v1@16.84,31.877
  Top Layer w0.254: RP1.6@62.001,36.093 62.001,29.87 62.763,29.108 66.827,29.108 JP.3@70.129,32.41
  Bottom Layer w0.203: U3.1@11.836,82.601 11.887,82.652 11.887,87.427 13.335,88.875 RP1.4@18.847,88.875 ; v2@14.935,75.235 16.891,73.279 v1@16.891,31.75
  other v1: 16.916,31.75
  other v2: 15.011,75.184 11.938,81.61
INTR: U3.3@14.453,82.55 U3.4@15.723,82.55 | length 1.4
  Bottom Layer w0.203: U3.3@14.453,82.575 15.672,82.575 U3.4@15.748,82.499 ; U3.4@15.723,82.728 U3.4@15.748,82.702
INTRS: U3.10@16.993,76.962 U3.11@15.723,76.962 | length 1.4
  Bottom Layer w0.203: U3.11@15.748,77.038 16.993,77.038 U3.10@17.069,77.114
INTS: U3.6@18.263,82.55 U3.12 | length 15.5
  Bottom Layer w0.203: U3.12@14.376,77.013 14.402,77.038 14.402,77.699 15.637,78.934 19.025,78.934 20.218,80.128 20.218,80.188 20.218,83.972 20.041,84.15 18.872,84.15 18.263,83.541 U3.6@18.263,82.499 ; U3.12@14.478,76.048 U3.12@14.478,76.886
IO: U1.6@40.364,31.775 U2.2@34.696,29.235 | length 6.8
  Top Layer w0.254: U2.2@34.696,29.235 37.236,31.775 U1.6@40.411,31.775
LED: R10.2 U4.10 | length 2.5
  Top Layer w0.203: v1@58.42,62.357 58.547,62.484 U4.10@58.547,64.77
  other v1: 58.547,62.357
MISO: JP1.4 Master<-->Slave.2 Master<-->Slave.6 RP6.6 U1.7@79.695,90.399 U2.9@55.804,56.337 U4.16 | length 47.8
  Top Layer w0.152: RP6.6@65.151,61.722 RP6.6@65.278,61.722
  Top Layer w0.203: Master<-->Slave.6@43.942,61.341 Master<-->Slave.6@44.044,61.443 ; v1@46.736,61.468 46.863,61.341 53.213,61.341 55.626,58.928 U2.9@55.626,56.261 ; U4.16@63.5,64.77 63.5,62.103 63.881,61.722 RP6.6@65.151,61.722 ; U1.7@79.781,90.399 79.654,90.526 79.654,94.082 83.337,97.765 JP1.4@84.226,97.765
  Bottom Layer w0.203: v1@39.243,65.913 43.688,61.468 v1(46.99,61.468) ; U2.9@55.88,56.388 57.718,56.388 63.433,62.103 v2@63.433,62.992 ; JP1.4@83.972,97.765 JP1.4@84.226,97.765
  other v1: 44.323,61.468 39.37,66.04
  other v2: 63.5,62.992
MOSI: JP1.2 Master<-->Slave.3 Master<-->Slave.5 RP1.6@83.82,95.098 RP6.7 U2.1@55.804,46.177 U4.15 | length 66.2
  Top Layer w0.203: Master<-->Slave.3@38.481,61.341 38.481,58.547 39.243,57.785 v1(44.323,57.785) ; Master<-->Slave.3@38.608,61.341 38.735,61.468 38.989,61.468 43.536,66.015 Master<-->Slave.5@43.942,66.015 ; v1@46.99,57.912 50.165,54.737 50.165,50.038 52.959,47.244 54.483,47.244 55.499,46.228 U2.1@55.753,46.228 ; U4.15@62.484,64.389 62.611,64.262 62.611,61.468 63.246,60.833 RP6.7@65.278,60.833
  Bottom Layer w0.203: v1@44.196,57.785 v1(46.99,57.785) ; U2.1@55.88,46.228 55.88,46.355 62.484,52.959 62.484,59.182 v2@64.224,60.922 ; RP1.6@83.845,95.098 83.845,95.606 84.226,95.987 87.655,95.987 JP1.2@89.306,97.638
  other v2: 64.262,60.884
MOTOR: JP3.1@38.1,70.663 U4.2 | length 25.1
  Top Layer w0.203: v2@54.135,74.93 54.135,72.103 54.61,71.628 U4.2@55.753,71.628
  Bottom Layer w0.203: JP3.1@38.227,70.739 43.815,70.739 50.038,76.962 53.594,76.962 54.102,76.454 54.102,74.803 v2@53.975,74.676
  other v2: 54.102,74.93
NetBELL_2: BELL.2 R3.1@48.895,81.001 | length 3.9
  Top Layer w0.762: R3.1@48.768,80.899 BELL.2@48.768,84.836
NetC1_1: C1.1@60.782,6.731 U1.8@54.762,6.909 | length 7
  Top Layer w0.203: U1.8@54.762,6.909 54.762,6.782 55.829,5.715 59.766,5.715 v1(60.782,6.731)
NetC1_2: C1.2@21.819,62.713 C1.2@40.284,26.441 C1.2@60.782,9.017 C3.2@40.284,26.441 OSC.2@20.599,66.218 U1.8@40.364,29.235 U1.12 U2.8@17.106,73.381 | length 21.4
  Top Layer w0.203: U2.8@17.094,73.482 17.094,69.19 OSC.2@20.396,65.888 ; OSC.2@20.904,66.192 20.904,63.805 C1.2@21.907,62.801 ; U1.12@55.651,9.296 55.651,9.347 56.464,10.16 59.639,10.16 v1(60.782,9.017)
  Top Layer w0.254: C1.2@40.411,26.441 U1.8@40.411,29.108
  other v1: 40.284,25.806
NetC2_1: C2.1@50.546,46.152 U2.2@53.264,46.177 | length 2.8
  Bottom Layer w0.762: C2.1@50.419,46.355 50.546,46.228 U2.2@53.213,46.228
NetC2_2: C2.2@15.037,62.763 C2.2@58.75,9.017 OSC.1@15.519,66.218 U1.10 U2.7@16.306,73.381 | length 14.7
  Top Layer w0.203: C2.2@14.834,62.865 14.834,65.532 OSC.1@15.519,66.218 ; OSC.1@15.646,66.192 16.281,66.827 U2.7@16.281,73.558 ; U1.10@55.651,8.296 58.03,8.296 v1(58.75,9.017)
NetC6_1: C6.1@49.428,25.044 OSC.2@55.651,28.346 R2.2@51.714,27.203 RT.7 | length 12.9
  Top Layer w0.254: C6.1@49.555,25.171 49.682,25.171 R2.2@51.714,27.203 ; R2.2@51.714,27.076 54.508,27.076 55.778,28.346 55.778,28.6 57.302,30.124 59.842,30.124 RT.7@60.096,30.378
NetC9_2: C9.2@48.539,73.203 OSC1.2@48.311,71.069 U4.7 | length 12.3
  Top Layer w0.203: OSC1.2@48.514,70.993 48.641,70.866 48.641,68.58 49.657,67.564 U4.7@55.88,67.564
  Bottom Layer w0.203: OSC1.2@48.514,71.12 C9.2@48.514,73.279
NetC10_2: C10.2@48.209,63.932 OSC1.1@48.311,65.989 U4.8 | length 10.1
  Top Layer w0.203: OSC1.1@48.26,65.913 49.137,66.79 U4.8@55.778,66.79
  Bottom Layer w0.203: C10.2@48.133,63.754 48.26,63.881 OSC1.1@48.26,65.913
NetD1_K: D1.K R4.1@63.348,54.407 R5.1@65.405,52.172 U3.2@64.861,45.517 | length 11.5
  Top Layer w0.203: D1.K@61.087,54.356 63.119,54.356 R4.1@63.246,54.229 ; R4.1@63.5,54.229 65.151,52.578 R5.1@65.151,52.451 ; U3.2@64.897,45.593 64.897,51.308 R5.1@65.659,52.07
NetD2_K: D2.K R6.1@67.539,52.121 U3.3@65.511,45.517 | length 10.2
  Top Layer w0.203: U3.3@65.532,45.593 65.532,49.784 R6.1@67.691,51.943 ; R6.1@67.437,52.197 67.691,52.197 D2.K@69.596,54.102
NetF1_2: F1.2 U3.1@64.211,45.517 | length 32.8
  Top Layer w0.381: F1.2@36.449,41.529 58.801,41.529 59.563,42.291 59.563,46.101 60.198,46.736 63.627,46.736 64.262,46.101 U3.1@64.262,45.72
NetF2_2: F2.2 SW.2 | length 7.9
  Bottom Layer w0.762: SW.2@35.433,47.879 37.338,45.974 37.338,43.942 39.37,41.91 F2.2@39.37,41.656
NetLed1_A: Led1.A R1.2@37.313,56.667 R6.2@25.806,74.016 | length 4.5
  Bottom Layer w0.762: R1.2@37.592,56.769 40.513,56.769 v1@41.656,55.626
  other v1: 41.783,55.499 25.857,74.752
NetLed2_A: Led2.A R10.1
  other v1: 59.309,59.309
NetN1_B: N1.B R8.2 RP1.4@82.982,93.066 | length 13.7
  Top Layer w0.762: R8.2@55.626,80.391 R8.2@55.753,80.518
  Bottom Layer w0.305: N1.B@78.384,87.605 82.982,92.202 RP1.4@82.982,93.066
  Bottom Layer w0.762: v1(51.054,77.978) 51.054,78.867 52.959,80.772 v1@55.499,80.772
  other v1: 55.626,80.772
NetN1_C: N1.C@52.451,79.959 R3.2@48.895,78.715 | length 3.9
  Top Layer w0.762: R3.2@48.895,79.121 49.53,79.121 50.292,79.883 52.324,79.883 N1.C@52.451,80.01
NetN2_B: N2.B RP1.3@83.82,93.066 | length 6.3
  Bottom Layer w0.203: N2.B@81.813,87.732 81.686,87.859 81.686,89.51 83.82,91.643 RP1.3@83.82,93.066
NetN3_B: N3.B RP1.2@84.658,93.066 | length 5.6
  Bottom Layer w0.203: RP1.2@84.607,93.066 84.607,88.494 N3.B@85.369,87.732
NetOSC_1: OSC.1@55.651,33.426 R3.2@51.714,34.823 RT.6 | length 9.7
  Top Layer w0.254: R3.2@51.714,34.823 54.254,34.823 OSC.1@55.651,33.426 ; OSC.1@55.524,33.426 OSC.1@55.651,33.426 ; RT.6@59.969,31.648 59.842,31.775 57.302,31.775 OSC.1@55.651,33.426
NetOV7670_3: OV7670.3 R4.2@24.917,19.228 | length 5.2
  Top Layer w0.203: OV7670.3@26.111,13.691 OV7670.3@26.111,14.021
  Bottom Layer w0.203: v1@24.917,18.11 24.917,14.783 OV7670.3@26.035,13.665
  other v1: 24.994,18.212
NetOV7670_4: OV7670.4 R5.1@26.975,19.202 | length 3
  Top Layer w0.203: OV7670.4@26.111,16.129 26.111,17.805 R5.1@27.026,18.72
NetR1_1: R1.1@3.277,14.732 Recv.4 | length 3.2
  Top Layer w0.508: R1.1@3.175,14.859 3.2,14.884 Recv.4@3.2,18.034
NetR9_2: R9.2 SW-PB.2 SW-PB.4 | length 16
  Top Layer w0.254: R9.2@69.215,86.233 71.628,88.646 71.628,92.71 SW-PB.4@70.104,94.234
  Bottom Layer w0.254: SW-PB.2@63.627,94.361 69.85,94.361 SW-PB.4@69.977,94.488
NRST: C17.2@60.528,79.223 R2.1@61.316,89.154 SW-PB.1 SW-PB.3 U2.5@55.804,51.257 U4.29 U5.2 | length 51.5
  Top Layer w0.203: U2.5@55.753,51.308 U2.5@56.007,51.308 ; U4.29@59.944,74.422 60.071,74.549 60.071,78.613 C17.2@60.579,79.121 ; v2@60.071,71.882 U4.29@60.071,74.422 ; C17.2@60.325,79.375 61.341,80.391 R2.1@61.341,89.154 ; R2.1@61.214,89.154 61.722,89.662 SW-PB.1@63.627,89.662
  Bottom Layer w0.203: U2.5@55.88,51.181 54.356,52.705 54.356,64.643 58.42,68.707 59.563,68.707 60.198,69.342 v2@60.198,71.628 ; SW-PB.1@63.5,89.789 SW-PB.3@70.231,89.789
  other v2: 59.944,71.755
PA0: OV7670.15 PA0<-->PA7.8 U2.37 | length 78.3
  Top Layer w0.203: PA0<-->PA7.8@3.378,76.352 4.547,77.521 4.547,80.569 5.283,81.305 5.283,81.407 5.436,81.559 7.137,81.559 7.722,80.975 9.119,80.975 U2.37@9.169,80.924
  Bottom Layer w0.203: PA0<-->PA7.8@3.302,76.429 3.302,76.302 4.877,74.727 4.877,70.208 6.807,68.278 6.807,53.924 9.042,51.689 9.042,31.862 6.172,28.991 6.172,21.872 9.652,18.393 9.652,14.884 OV7670.15@10.82,13.716